# Altium PCB 795492740IHM08M1-DG_V4.PcbDoc
Units mil, origin at the board's own origin, x right, y up, seen from the top; angles counter-clockwise.
Board outline 2933.65 x 3933.51 mil, 2 copper layers (Top Layer, Bottom Layer); 137 components, 129 nets, 388 pads, 359 vias.
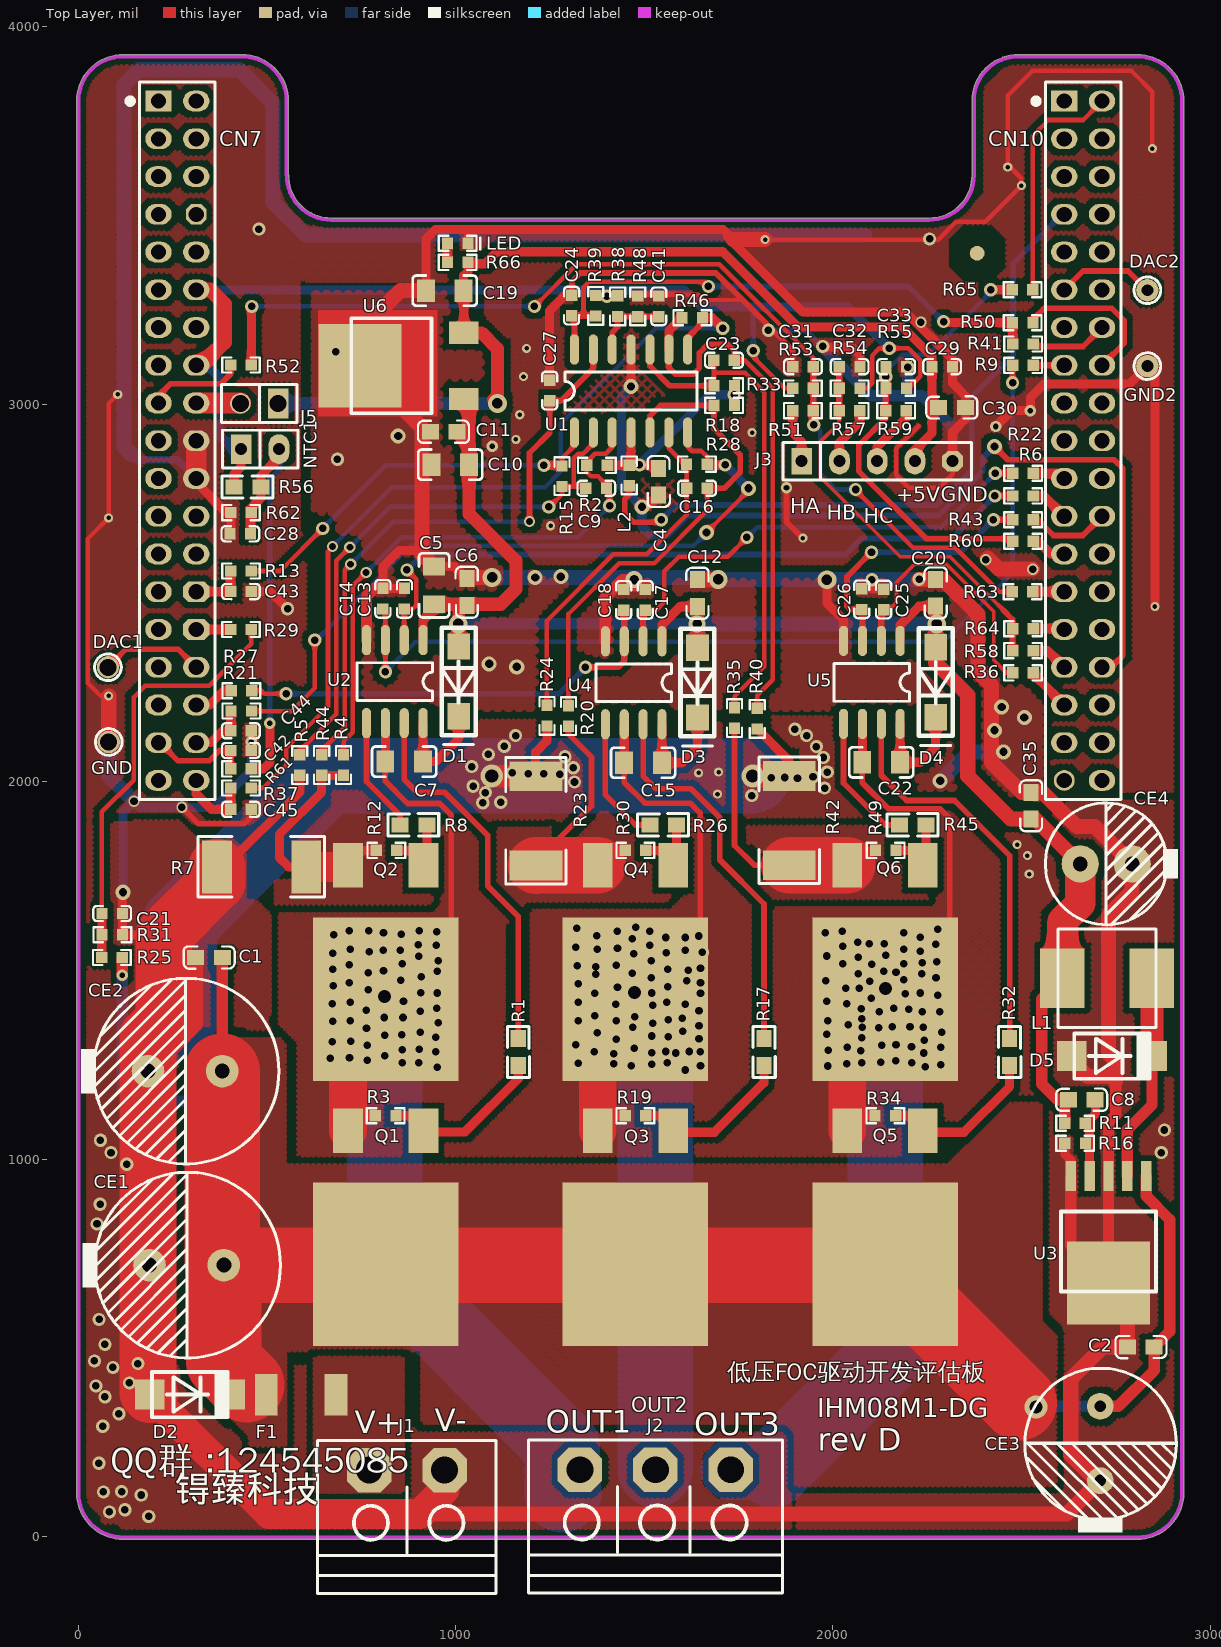
[diagram p0: Top Layer view]
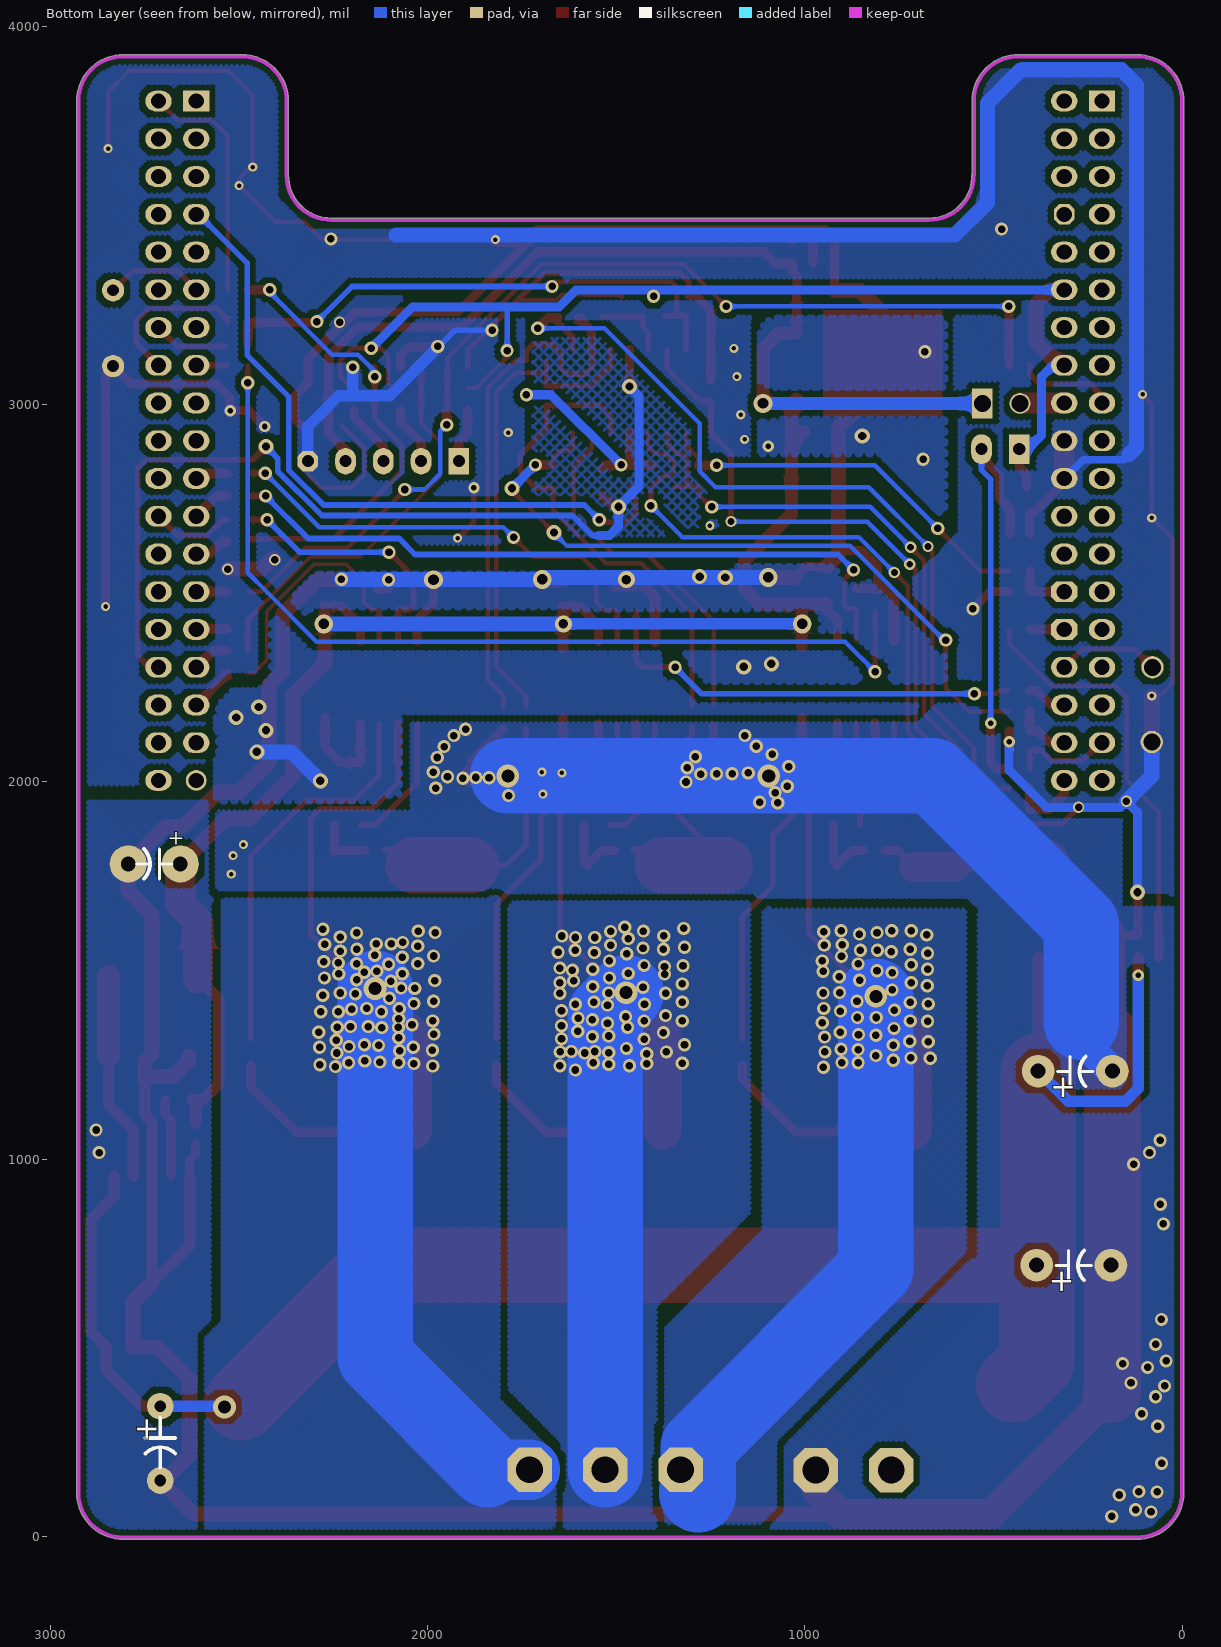
[diagram p1: Bottom Layer view, seen from below]

## Layer stack, top to bottom
Top Solder: solder mask 0.4, Solder Resist, Dk 3.5
Top Layer: signal copper 1.4
Dielectric 1: dielectric 12.6, FR-4, Dk 4.8
Bottom Layer: signal copper 1.4
Bottom Solder: solder mask 0.4, Solder Resist, Dk 3.5

## Board outline
-4.02,115.85 ccw(c119.11,115.85) 119.11,-7.27 2806.51,-7.27 ccw(c2806.51,115.85) 2929.64,115.85 2929.64,3803.11 ccw(c2806.51,3803.11) 2806.51,3926.24 2491.55,3926.24 ccw(c2491.55,3921.22) 2491.27,3926.23 ccw(c2491.55,3803.1) 2368.43,3803.1 2368.43,3606.24 cw(c2373.44,3606.24) 2368.43,3606.27 2368.43,3606.24 cw(c2255.33,3606.24) 2255.33,3493.14 670.65,3493.14 cw(c670.65,3606.24) 557.55,3606.24 ccw(c552.54,3606.24) 557.2,3608.09 557.2,3803.1 ccw(c434.07,3803.1) 434.08,3926.23 434.07,3926.23 cw(c434.07,3803.1) 434.08,3926.23 434.07,3926.23 119.11,3926.24 ccw(c119.11,3921.22) 119.11,3926.24 ccw(c119.11,3803.11) -4.02,3803.11

## Design rules (kind name [scope] priority, off if disabled: settings)
Clearance [All] p1: gap=15
PolygonConnect [All] p1: connectstyle=Direct reliefconductorwidth=20 reliefentries=4 polygonreliefangle="45 Angle" airgapwidth=20
RoutingVias [All] p1: holewidth=28 width=50 viastyle="Through Hole" minholewidth=12 minwidth=20 maxholewidth=50 maxwidth=100
SolderMaskExpansion [All] p1: expansion=4
Width [All] p1: maxlimit=200 minlimit=10 preferedwidth=10
30 further rules are at their usual default settings.

## Components (designator, comment, footprint, x,y, rotation, side; value= is the part's Value field where it differs from the comment)
C1 "104/63V" 0805C 349,1532 r180 top
C2 "104/63V" 0805C 2818,500 r180 top
C4 "47uF/16V" 0805C 1540,2797 r270 top
C5 "10uF/25V" 1206C 942.09,2519.29 r90 top
C6 "105/50V" 0805C 1028.09,2500.11 r90 top
C7 "106/25V" 1206C 863,2054 r0 top
C8 "102/25V" 0805C 2657.05,1158.99 r0 top
C9 "20pF/10V" 0603C 1374,2780 r180 top
C10 "10uF/25V" 1206C 986.59,2839 r180 top
C11 "104" 0805C 966,2929 r0 top
C12 "105/50V" 0805C 1639.09,2497.11 r90 top
C13 "100pF/10V" 0603C 867.09,2483.36 r90 top
C14 "100pF/10V" 0603C 810.09,2483.36 r90 top
C15 "106/25V" 1206C 1496,2051 r0 top
C16 "20pF/10V" 0603C 1641,2780 r180 top
C17 "100pF/10V" 0603C 1505.09,2480.36 r90 top
C18 "100pF/10V" 0603C 1448.09,2480.36 r90 top
C19 "47uF/16V" 1206C 972,3300 r180 top
C20 "105/50V" 0805C 2270.09,2498.11 r90 top
C21 "105/10V" 0603C 89,1648 r0 top
C22 "106/25V" 1206C 2127,2052 r0 top
C23 "20pF/10V" 0603C 1710,3114 r0 top
C24 "104/10V" 0603C 1310,3260 r90 top
C25 "100pF/10V" 0603C 2136.73,2481.36 r90 top
C26 "100pF/10V" 0603C 2079,2482 r90 top
C27 "104/10V" 0603C 1252,3035 r90 top
C28 "104/10V" 0603C 431,2659 r180 top
C29 "104/10V" 0603C 2288,3097 r0 top
C30 "47uF/16V" 0805C 2313,2993 r0 top
C31 "20pF/10V" 0603C 1921.64,3102.15 r180 top
C32 "20pF/10V" 0603C 2042.84,3097 r0 top
C33 "20pF/10V" 0603C 2166.32,3097 r0 top
C35 "104/50V" 0805C 2523,1934 r90 top
C41 "105/10V" 0603C 1541,3258 r90 top
C42 "105/10V" 0603C 430,2080 r0 top
C43 "102/10V" 0603C 430,2501 r0 top
C44 "102/10V" 0603C 430,2132 r0 top
C45 "102/10V" 0603C 430,1924 r0 top
CE1 "470uF/63V" E5-12.5 386,719 r180 top
CE2 "470uF/63V" E5-12.5 382,1233 r180 top
CE3 "220uF/63V" E5-10 2708,345 r270 top
CE4 "470uF/25V" E3.5-8.2 2655,1782 r0 top
CN7 "Header 19X2" 2*19P#1 212.81,3803.11 r270 top locked (schematic designator CN9)
CN10 "Header 19X2" 2*19P#2 2612.81,3803.11 r270 top locked
D1 "RS1M" TP4007 1008,2358 r270 top
D2 "SMAJ48A" TPss24 296,376 r0 top
D3 "RS1M" TP4007 1641,2355 r270 top
D4 "RS1M" TP4007 2272,2356 r270 top
D5 "SS24" TPss24 2739,1273 r0 top
DAC1 "DAC1" TP-1.5#1 79,2303 r0 top
DAC2 "DAC2" TP-1.5#2 2833,3302 r0 top
F1 "20A" F1808 584,371 r180 top
GND "GND" TP-1.5#1 81,2105 r90 top (schematic designator TP2)
GND2 "GND2" TP-1.5#2 2833,3101 r0 top
J1 "POWER" POW-5.08-2W 771,176 r0 top
J2 "MOTOR" POW-5.08-3W 1323,167 r0 top
J3 "SENSOR" SIP5 1917,2849 r0 top
J5 "5V IN" SIP2#1 530,3002 r180 top
L1 "47uH" L-TB-7*7 2726,1479 r180 top
L2 "10uH" 0603 1457,2809 r270 top
LED "RED" 0603D 977,3424 r0 top
NTC1 "10K" SIP2#2 432,2881 r0 top
Q1 "SE100150G" TO-263S 815,1075 r180 top
Q2 "SE100150G" TO-263S 815,1778 r180 top
Q3 "SE100150G" TO-263S 1476.5,1075 r180 top
Q4 "SE100150G" TO-263S 1476.5,1778 r180 top
Q5 "SE100150G" TO-263S 2138,1075 r180 top
Q6 "SE100150G" TO-263S 2138,1778 r180 top
R1 "51R" 0805 1167,1287 r270 top
R2 "6.8K/1%" 0603 1377,2835 r0 top
R3 "10K" 0603 817,1112 r0 top
R4 "680" 0603 706,2046 r90 top
R5 "1K/1%" 0603 590,2046 r90 top
R6 "22R" 0603 2501.02,2759.85 r180 top
R7 "0.01/3W/1%" 2512 368,1774 r0 top
R8 "51R" 0805 885,1886 r0 top
R9 "22R" 0603 2501.02,3105.85 r180 top
R11 "10K" 0603 2638.95,1097.77 r180 top
R12 "10K" 0603 819,1815 r0 top
R13 "22R" 0603 429,2561 r180 top
R15 "4.7K/1%" 0603 1279,2807 r270 top
R16 "1K" 0603 2643.91,1038.99 r0 top
R17 "51R" 0805 1818,1287 r270 top
R18 "6.8K/1%" 0603 1714,2994 r0 top
R19 "10K" 0603 1479,1112 r0 top
R20 "680" 0603 1302,2176 r90 top
R21 "22R" 0603 430,2190 r180 top
R22 "22R" 0603 2501.02,2819.85 r180 top
R23 "0.01/3W/1%" 2512 1213,2014 r270 top
R24 "1K/1%" 0603 1245,2177 r90 top
R25 "200K/1%" 0603 92,1531 r0 top
R26 "51R" 0805 1546.5,1886 r0 top
R27 "22R" 0603 435,2238 r0 top
R28 "4.7K/1%" 0603 1637,2844 r180 top
R29 "22R" 0603 429,2406 r180 top
R30 "10K" 0603 1479,1815 r0 top
R31 "10K/1%" 0603 88,1597 r180 top
R32 "51R" 0805 2469,1287 r270 top
R33 "6.8K/1%" 0603 1714,3046 r0 top
R34 "10K" 0603 2141,1112 r0 top
R35 "680" 0603 1742,2171 r90 top
R36 "22R" 0603 2501,2291 r180 top
R37 "22R" 0603 429,1986 r180 top
R38 "20K" 0603 1432.15,3262.02 r90 top
R39 "10K" 0603 1374.15,3263.02 r90 top
R40 "1K/1%" 0603 1802,2169 r90 top
R41 "22R" 0603 2505.98,3156.82 r0 top
R42 "0.01/3W/1%" 2512 1884,2015 r270 top
R43 "22R" 0603 2501.02,2696.85 r180 top
R44 "680" 0603 648,2046 r90 top
R45 "51R" 0805 2208,1886 r0 top
R46 "4.7K/1%" 0603 1625,3232 r180 top
R48 "5.1K" 0603 1480,3257 r270 top
R49 "10K" 0603 2142,1815 r0 top
R50 "22R" 0603 2505,3213 r0 top
R51 "2K" 0603 1922.98,2980.15 r0 top
R52 "22R" 0603 434,3101 r0 top
R53 "10K" 0603 1918.02,3045.42 r180 top
R54 "10K" 0603 2046.46,3039.72 r0 top
R55 "10K" 0603 2169.94,3039.72 r0 top
R56 "10K" 0805 452,2780 r180 top
R57 "2K" 0603 2041.5,2985.85 r180 top
R58 "22R" 0603 2501,2350 r180 top
R59 "2K" 0603 2164.98,2985.85 r180 top
R60 "22R" 0603 2501.02,2639.85 r180 top
R61 "22R" 0603 434,2031 r0 top
R62 "4.7K" 0603 434,2710 r0 top
R63 "22R" 0603 2500,2506 r180 top
R64 "22R" 0603 2501,2408 r180 top
R65 "22R" 0603 2500,3306 r180 top
R66 "1K" 0603 1008,3373 r0 top
U1 "RS624" SO-14 1315,2925 r90 top
U2 "PN7103SEC-R1" SO-8 914,2375 r270 top
U3 "XL7015E1" TO-252-5L 2730,955 r180 top
U4 "PN7103SEC-R1" SO-8 1547,2372 r270 top
U5 "PN7103SEC-R1" SO-8 2178,2373 r270 top
U6 "78M05" TO-252AA 1017,3014 r90 top

## Footprints (in the part's own frame and the unit in brackets; to place one, negate y for a bottom-side part, rotate by r counter-clockwise, add the part's x,y. Pads: shape width x height; smd on the part's side, far side on the other; paste and mask are expansions set on the pad)
2*19P#1 [mil]
  rect 55x70 hole 40: 1(0,0)
  oval 55x70 hole 40: 2(0,100) 3(100,0) 4(100,100) 5(200,0) 6(200,100) 7(300,0) 9(400,0) 10(400,100) 11(500,0) 12(500,100) 13(600,0) 14(600,100) 15(700,0) 16(700,100) 17(800,0) 18(800,100) 19(900,0) 20(900,100) 21(1000,0) 22(1000,100) 23(1100,0) 24(1100,100) 25(1200,0) 26(1200,100) 27(1300,0) 29(1400,0) 31(1500,0) 32(1500,100) 33(1600,0) 34(1600,100) 35(1700,0) 36(1700,100) 37(1800,0) 38(1800,100)
  oct 55x55 hole 40: 8(300,100)
  oct 55x70 hole 40: 28(1300,100) 30(1400,100)
  silkscreen extent -50,-82 1850,150
2*19P#2 [mil]
  rect 55x70 hole 40: 1(0,0)
  oval 55x70 hole 40: 2(0,100) 3(100,0) 4(100,100) 5(200,0) 6(200,100) 7(300,0) 8(300,100) 9(400,0) 10(400,100) 11(500,0) 12(500,100) 13(600,0) 14(600,100) 15(700,0) 16(700,100) 17(800,0) 18(800,100) 19(900,0) 20(900,100) 21(1000,0) 22(1000,100) 23(1100,0) 24(1100,100) 25(1200,0) 26(1200,100) 27(1300,0) 28(1300,100) 29(1400,0) 30(1400,100) 31(1500,0) 32(1500,100) 33(1600,0) 34(1600,100) 35(1700,0) 36(1700,100) 38(1800,100)
  round 55 hole 40: 37(1800,0)
  silkscreen extent -50,-82 1850,150
0603 [mil]
  rect 30x30 smd: 1(-29.48,2.91) 2(25.02,2.85)
  silkscreen extent -52,-17 48,23
0603C [mil]
  rect 30x30 smd: 1(-25.86,2.64) 2(28.64,2.57)
  silkscreen extent -49,-17 51,23
0603D [mil]
  rect 30x30 smd: A(1.66,2.32) K(56.16,2.26)
  silkscreen extent -21,-18 89,22
0805 [mil]
  rect 45x40 smd: 1(-31.97,-0.94) 2(38.9,-0.94)
  silkscreen extent -65,-30 70,29
0805C [mil]
  rect 45x40 smd: 1(-33.05,-1.99) 2(37.82,-1.99)
  silkscreen extent -66,-31 69,28
1206C [mm]
  rect 1.2x1.5 smd: 1(1.288,-0.023) 2(-1.252,-0.023)
  silkscreen extent -2.14,-1.04 2.18,0.99
2512 [mm]
  rect 2x3.556 smd: 1(0,0) 2(6,0)
  silkscreen extent -1.27,-2.03 7.24,2.03
E3.5-8.2 [mm]
  round 2.5 hole 1: 1(0,0) 2(3.5,0)
  silkscreen extent -2.35,-4.1 6.59,4.1
E5-10 [mm]
  round 1.8 hole 0.8: 1(0,0) 2(5,0)
  silkscreen extent -2.56,-5.07 8.5,5.13
E5-12.5 [mm]
  round 2.2 hole 1: 1(0,0) 2(5,0)
  silkscreen extent -3.81,-6.25 9.5,6.25
F1808 [mil]
  rect 60x110.24 smd: 1(-99.06,-4) 2(85.94,-4)
L-TB-7*7 [mm]
  rect 3x4 smd: 1(-3,0) 2(3,0)
  silkscreen extent -3.3,-3.3 3.3,3.3
POW-5.08-2W [mm]
  oct 3x3 hole 1.8: 1(0,0) 2(5.08,0)
  silkscreen extent -3.46,-8.3 8.54,2
POW-5.08-3W [mm]
  oct 3x3 hole 1.8: 1(0.163,0.254) 2(5.243,0.254) 3(10.323,0.254)
  silkscreen extent -3.3,-8.05 13.78,2.25
SIP2#1 [mil]
  rect 55x78.74 hole 45: 1(0,0)
  round 55 hole 45: 2(100,0)
  silkscreen extent -50,-50 150,50
SIP2#2 [mil]
  rect 55x78.74 hole 32: 1(0,0)
  oval 55x78.74 hole 32: 2(100,0)
  silkscreen extent -50,-50 150,50
SIP5 [mil]
  rect 55x70 hole 32: 1(0,0)
  oval 55x70 hole 32: 2(100,0) 3(200,0) 4(300,0)
  oct 55x55 hole 32: 5(400,0)
  silkscreen extent -50,-50 450,50
SO-8 [mil]
  oval 80x24 smd: 1(0,0) 2(0,-50) 3(0,-100) 4(0,-150) 5(220,-150) 6(220,-100) 7(220,-50) 8(220,0)
  silkscreen extent 60,-175 160,25
SO-14 [mil]
  oval 80x24 smd: 1(0,0) 2(0,-50) 3(0,-100) 4(0,-150) 5(0,-200) 6(0,-250) 7(0,-300) 8(220,-300) 9(220,-250) 10(220,-200) 11(220,-150) 12(220,-100) 13(220,-50) 14(220,0)
  silkscreen extent 60,-325 160,25
TO-252-5L [mm]
  rect 0.7x2 smd: 1(-2.54,0) 2(-1.27,0) 3(0,0) 4(1.27,0) 5(2.54,0)
  rect 5.6x5.6 smd: 3(0,7.2)
  silkscreen extent -3.2,2.38 3.2,7.78
TO-252AA [mm]
  rect 1.5x2 smd: 1(0,-0.127) 3(4.445,-0.127)
  rect 5.6x5.6 smd: 2(2.235,6.87)
  silkscreen extent -0.96,2.05 5.44,7.45
TO-263S [mm]
  rect 2x3 smd: 1(-2.54,0) 3(2.54,0)
  rect 9.8x11 smd: 2(0,9)
TP4007 [mil]
  rect 70x60 smd: A(0,0) K(185,0)
  silkscreen extent -50,-45 260,46
TP-1.5#1 [mm]
  round 1.5 hole 1.143: 1(0,0)
  silkscreen extent -0.9,-0.9 0.9,0.9
TP-1.5#2 [mm]
  round 1.5 hole 0.8: 1(0,0)
  silkscreen extent -0.9,-0.9 0.9,0.9
TPss24 [mm]
  rect 2x2 smd: A(-2.7,0) K(2.7,0)
  silkscreen extent -2.54,-1.52 2.54,1.52

## Part data
C1 C2 C4 C6 C7 C9 C12 C13 C14 C15 C16 C17 C18 C20 C21 C22 C23 C24 C25 C26 C27 C28 C29 C30 C31 C32 C33 C35 C41 C42 C43 C44 C45: library part C, "C"
C5 C8 C10 C11 C19: library part C, "Capacitor"
CE1 CE2 CE3 CE4: library part CE, "10uF/25V"
CN7 CN10: "Header, 19-Pin, Dual row"
D1 D2 D3 D4 D5: library part D, "D"
DAC1 DAC2 GND GND2: library part TP
F1: library part FUSE, "FUSE"
J1 J5 NTC1: library part CON2, "J"
J2: library part CON3, "CN"
J3: library part CON5, "CN"
L1: library part L, "10uH"
L2: library part L
LED: library part LED, "LED"
Q1 Q2 Q3 Q4 Q5 Q6: library part "MOSFET N"
R1 R2 R4 R5 R6 R7 R8 R9 R13 R15 R16 R17 R18 R20 R21 R22 R23 R24 R25 R26 R27 R28 R29 R31 R32 R33 R35 R36 R37 R38 R40 R41 R42 R43 R44 R45 R46 R48 R50 R51 R52 R57 R58 R59 R60 R61 R62 R63 R64 R65 R66: library part R, "10K"
R3 R11 R12 R19 R30 R34 R39 R49 R53 R54 R55 R56: library part R
U1: library part LM324
U2 U4 U5: library part IR2101S
U3: library part XL1507-ADJ
U6: library part 7805S, "IC"

## Free pads (board coordinates)
  round 39.37 smd mask+39.37: 5(2382,3400)

## Via types
v1: diameter 35, hole 20, Top Layer to Bottom Layer, 291 vias
v2: diameter 24, hole 12, Top Layer to Bottom Layer, 21 vias
v3: diameter 40, hole 22, Top Layer to Bottom Layer, 16 vias
v4: diameter 30, hole 15, Top Layer to Bottom Layer, 7 vias
v5: diameter 60, hole 35, Top Layer to Bottom Layer, 6 vias
v6: diameter 50, hole 28, Top Layer to Bottom Layer, 6 vias
v7: diameter 30, hole 20, Top Layer to Bottom Layer, 5 vias
v8: diameter 30, hole 18, Top Layer to Bottom Layer, 5 vias
v9: diameter 45, hole 25, Top Layer to Bottom Layer, 2 vias

## Nets (pads, with @x,y where several pads share a name; then routed paths per layer and width w, separated by ;. In a path a pad name is that pad's centre, name@x,y a point inside that pad or via, vN(x,y) a via of type N, cw(c..) or ccw(c..) an arc to the next point about the centre after c; other vN are vias at no path point)
3V3: CN7.12 CN7.16 NTC1.1 R38.2 R39.2 R53.2 R54.2 R55.2 R56.2 | length 3240.8
  Top Layer w12: v1(1789,3142) 1789,3125.11 1871.54,3042.57 R53.2 ; R54.2 2091.57,3042.57 2104,3055 2104,3129 2123,3148 v1(2149,3148) 2199.16,3148 2231.14,3116.02 2231.14,3074.17 2199.55,3042.57 R55.2
  Top Layer w24: R56.2 413.1,2815.1 432,2834 NTC1.1
  Top Layer w40: CN7.16 326.11,3103.11 387,3164 387,3266 349.89,3303.11 CN7.12
  Bottom Layer w15: v1(1789,3142) 1789,3255 1791,3257
  Bottom Layer w24: CN7.16 342.89,3103.11 373,3073 373,2918 410,2881 NTC1.1 ; CN7.12 v1@1402,3303.11 ; v1(1401,3286) 1401,3302.11 v1@1402,3303.11 ; v1(2149,3148) 2040,3257 1791,3257 1652,3257 1605.89,3303.11 v1@1402,3303.11
+5: C19.2 C29.1 C30.1 J3.4 J5.1 R66.2 U6.3 | length 2693.4
  Top Layer w24: C19.2 1021.29,3340.29 1033.02,3352.02 R66.2 1036.87,3372 1077,3372 1109,3404 1708,3404 1908,3204 2184.73,3204 2262.14,3126.59 C29.1 2262.14,2923.14 2217,2878 J3.4 ; U6.3 C19.2@1022,3300.91
  Top Layer w35: U6.3 1069,3189 1111,3147 v6(1111,3002) v6@1101,3012
  Bottom Layer w35: J5.1 v6(1111,3002)
+14: C5.2 C6.1 C8.1 C10.2 C11.2 C12.1 C20.1 C35.1 CE4.1 D1.A D3.A D4.A L1.2 R11.2 U2.1 U4.1 U5.1 U6.1 | length 4411.9
  Top Layer w24: U2.1 914,2427 943,2456 C5.2 ; U4.1 1547,2416 1595.07,2464.07 C12.1 ; U5.1 2178,2415 2228.07,2465.07 C20.1
  Top Layer w30: 1005,2470 1008,2467 D1.A ; D3.A 1641.09,2355.09 C12.1 ; D4.A@2272.09,2356.09 C20.1 ; L1.2 2553,1424.11 2553,1199 2595,1157 C8.1 2613.93,1146.93 R11.2
  Top Layer w35: C5.2 1005,2470 1120,2470 1160,2510 1160,2585 1035.89,2709.11 C10.2 1035.89,2894.94 ; C11.2 1035.89,2894.94 ; U6.1 1035.89,3000.11 1035.89,2894.94
  Top Layer w40: D4.A@2272.09,2356.09 2272.09,2314.91 2357,2230 2357,2015 2471.05,1900.95 C35.1 2536.05,1900.95 CE4.1
  Top Layer w80: L1.2 2607.89,1629.89 2655,1677 CE4.1
  Bottom Layer w30: v6(1007,2418) v9(1640,2418)
  Bottom Layer w40: v9(1640,2418) v6(2275,2418)
AGND: C4.2 CN10.32 U1.11 | length 2555.6
  Top Layer w15: v3(2428,2888) 2463,2853 2745,2853 2768,2830 2768,2334 2737.11,2303.11 CN10.32
  Top Layer w24: v3@1460,3042 v3(1465,3047) U1.11 ; v3(1494,2728) 1506.83,2728 C4.2
  Bottom Layer w15: 1546,2652 1563,2652 1616,2705 2279.53,2705 2397,2822.47 2397,2857 v3(2428,2888)
  Bottom Layer w24: v3(1465,3047) 1440,3022 1440,2782 v3(1494,2728) 1494,2676 1518,2652 1546,2652
AVDD: CN10.7 L2.2 | length 1846.7
  Top Layer w15: L2.2 1459.85,2759.85 1448,2748 1448,2712 1473,2687 1538,2687 v1(1545,2694)
  Bottom Layer w15: v1(1545,2694) 1584,2733 2275,2733 2368,2826 2368,3020 2478,3130 2478,3374 2607.11,3503.11 CN10.7
BKIN: C24.1 R39.1 R41.1 R50.1 U1.14 | length 1459.9
  Top Layer w12: 1339,3234.16 1339,3310 1353,3324 1658,3324 v1(1670,3312)
  Top Layer w15: U1.14 C24.1@1315,3227.67 ; C24.1@1315,3233.67 1314.51,3234.16 1339,3234.16 1370.62,3234.16 R39.1
  Top Layer w24: v1(2293,3219) 2296.09,3215.91 R50.1 2476.5,3214.93 R41.1
  Bottom Layer w15: v1(1670,3312) 2200,3312 v1(2293,3219)
C7_1: CN7.1
C7_2: CN7.2
C7_3: CN7.3
C7_4: CN7.4
C7_5: CN7.5
C7_6: CN7.6
C7_7: CN7.7
C7_8: CN7.8
C7_9: CN7.9
C7_10: CN7.10
C7_11: CN7.11
C7_13: CN7.13
C7_14: CN7.14
C7_15: CN7.15
C7_17: CN7.17 R52.1 | length 258.7
  Top Layer w15: CN7.17 212.81,3022.81 244,3054 378,3054 404.52,3080.52 R52.1
C7_18: CN7.18 J5.2 | length 117.1
  Top Layer w55: CN7.18 J5.2@429.89,3003.11
C7_19: CN7.19
C7_21: CN7.21
C7_23: CN7.23
C7_24: CN7.24
C7_25: CN7.25
C7_26: CN7.26
C7_27: CN7.27
C7_28: C43.1 CN7.28 R13.2 | length 146.1
  Top Layer w24: CN7.28 313.34,2503.64 C43.1 403.98,2503.8 R13.2
C7_29: CN7.29
C7_30: CN7.30 R29.2 | length 91.1
  Top Layer w24: CN7.30 R29.2
C7_31: CN7.31
C7_32: CN7.32 DAC1.1 | length 273.5
  Top Layer w15: DAC1.1 127,2351 264.92,2351 CN7.32
C7_33: CN7.33
C7_34: CN7.34 R27.1 | length 108.4
  Top Layer w24: CN7.34 348.11,2203.11 385.91,2240.91 R27.1
C7_35: C42.1 CN7.35 R61.1 | length 271.6
  Top Layer w15: CN7.35 216.89,2103.11 265,2055 347,2055 374.64,2082.64 C42.1 404.14,2034.29 R61.1
C7_36: C44.1 CN7.36 R21.2 | length 157.3
  Top Layer w24: CN7.36 351.11,2103.11 382.64,2134.64 C44.1 404.98,2135.48 R21.2
C7_37: CN7.37
C7_38: C45.1 CN7.38 R37.2 | length 200.6
  Top Layer w24: CN7.38 312.81,1967.19 353.36,1926.64 C45.1 404.14,1982.99 R37.2
C10_1: CN10.1
C10_2: CN10.2 R65.1 | length 629.7
  Top Layer w12: R65.1 2529.48,3711.48 2571,3753 2662.7,3753 CN10.2
C10_3: CN10.3
C10_4: CN10.4
C10_5: CN10.5
C10_6: CN10.6
C10_8: CN10.8
C10_9: CN10.9
C10_10: CN10.10
C10_11: CN10.11 DAC2.1 | length 262
  Top Layer w15: CN10.11 2662.7,3353 2782,3353 DAC2.1
C10_12: CN10.12
C10_13: CN10.13 | length 18.7
  Top Layer w24: CN10.13@2599.59,3216.33 CN10.13
C10_14: CN10.14 R41.2 | length 195.9
  Top Layer w15: R41.2@2537.67,3153 2662.7,3153 CN10.14
C10_15: CN10.15 R9.1 | length 82.1
  Top Layer w15: R9.1 CN10.15@2612.64,3102.94
C10_16: CN10.16 R50.2 | length 418.4
  Top Layer w10: CN10.16 CN10.16@2717.7,3108
  Top Layer w15: R50.2 2530.02,3225.02 2559,3254 2739,3254 2771,3222 2771,3161.3 CN10.16@2717.7,3108
C10_17: CN10.17
C10_18: CN10.18
C10_19: CN10.19
C10_20: CN10.20
C10_21: CN10.21 R22.1 | length 88
  Top Layer w24: R22.1 2598.99,2816.94 CN10.21
C10_22: CN10.22
C10_23: CN10.23 R6.1 | length 104.6
  Top Layer w24: R6.1 2558.99,2756.94 CN10.23
C10_24: CN10.24 R43.1 | length 220.9
  Top Layer w15: R43.1 2542.06,2693.94 2584,2652 2661.7,2652 CN10.24
C10_25: CN10.25 R60.1 | length 96.3
  Top Layer w24: R60.1 2543.06,2636.94 2576.89,2603.11 CN10.25
C10_26: CN10.26
C10_27: CN10.27 R63.1 | length 83.3
  Top Layer w24: R63.1 CN10.27
C10_28: CN10.28
C10_29: CN10.29 R64.1 | length 83.3
  Top Layer w24: R64.1 2610.49,2405.09 2612.64,2402.94 CN10.29
C10_30: CN10.30
C10_31: CN10.31 R58.1 | length 100.5
  Top Layer w24: R58.1 2568.83,2347.09 CN10.31
C10_33: CN10.33 R36.1 | length 119.1
  Top Layer w24: R36.1 2530.48,2285.44 CN10.33
C10_34: CN10.34
C10_35: CN10.35
C10_36: CN10.36
C10_37: CN10.37
C10_38: CN10.38
GND: C1.2 C2.2 C5.1 C6.2 C10.1 C11.1 C12.2 C13.2 C14.2 C17.2 C18.2 C19.1 C20.2 C21.2 C24.2 C25.2 C26.2 C27.2 C28.2 C29.2 C30.2 C31.2 C32.2 C33.2 C35.2 C41.2 C42.2 C43.2 C44.2 C45.2 CE1.2 CE2.2 CE3.2 CE4.2 CN7.20 CN7.22 D2.A D5.A GND2.1 GND.1 J1.2 J3.5 LED.K R5.1 R7.1 R16.1 R23.1 R24.1 R31.1 R40.1 R42.1 R48.1 R62.1 U2.4 U3.3 U3.5 U4.4 U5.4 U6.2 | length 28387.2
  Top Layer w10: 1582,3291 1643.7,3291 1658.7,3276 1754,3276 1757.38,3279.38
  Top Layer w12: v2(81,2227) 60,2227 26,2261 26,2644 v2(81,2699) 81,3002 v2(105,3026) ; v2(1820,3436) 2278.98,3436 2325.98,3483 2403,3483 v2(2499,3579) 2499,3599 2463,3635 2463,3818 2528,3883 2791,3883 2846,3828 v2(2846,3677) v2@2853,3670 ; 2227,2943 2168,2884 2168,2812 2201,2779 2282,2779 2317,2814 J3.5
  Top Layer w15: v7(275,1932) 319,1888 439,1888 458.64,1907.64 C45.2 ; C24.2 1307.43,3324.19 1330.73,3347.5 1689.27,3347.5 1757.38,3279.38 1893,3143.77 C31.2 ; R48.1@1486.06,3286.5 1490.56,3291 1582,3291 ; v4(1877,2779) 1877,2688 v2(1920,2645)
  Top Layer w24: v3(119,1707) 117.48,1705.48 R31.1 225.91,1594.09 227,1593 ; CN7.22 312.81,2793.19 393.09,2712.91 R62.1 404.52,2658.59 C28.2 ; R7.1 389,1774 587.09,1972.09 R5.1 ; C42.2 C44.2 ; C43.2 509.43,2503.57 v1(555,2458) ; C13.2 C14.2 807.52,2569.52 850,2612 911,2612 ; C19.1 921.29,3437.29 947.13,3463.13 1034,3463.13 ; C5.1 998.02,2570 C6.2@1027.02,2541 ; LED.K@1033.16,3433.26 1034,3434.1 1034,3463.13 ; R23.1 1212,2015 1212,2078 1242.09,2108.09 R24.1 ; C27.2 1249.43,3247.43 1290.64,3288.64 C24.2 ; 1720,3444 1920,3244 2192.82,3244 2316.64,3120.17 C29.2 2316.64,3056.36 2350.82,3022.18 C30.2 2350.82,2959.82 2317,2926 J3.5 ; 1735.4,3436 1708.27,3463.13 1034,3463.13 ; R40.1 1884,2054.61 R42.1 ; v6(1984,2535) 1984,2473 2028,2429 U5.4 ; v1@1986,3152 2049,3152 2071.48,3129.52 C32.2 ; v1(2103,2535) 2103,2511.64 2104,2510.64 2133.52,2510.64 C25.2 ; v4(2431,2941) 2473,2983 v4(2523,2983) 2523,3017 2559,3053 2785,3053 GND2.1 2853,3081 v2(2853,2464) ; R16.1 2614.43,1012.57 2630,997 U3.5
  Top Layer w30: U2.4 764,2491 785,2512 C14.2 ; U4.4 1397,2489 1443,2535 v9(1473,2535) ; U3.5 2630,771.54 2730,671.54 2730,955 2730,1098 2749,1117 2749,1205
  Top Layer w40: GND.1 v2(81,2227) ; CE2.2 311.18,1359.03 C1.2 ; 906,59.74 2619.59,59.74 CE3.2 2697.85,148.15 2630,216 2630,417 2715,502 C2.2 2780.18,621.35 U3.3@2730,671.54 ; C19.1 853.91,3300.91 746.54,3193.54 U6.2 911,2937.54 911,2612 911,2602 C5.1 ; C6.2@1027.02,2541 v6(1097,2541) ; C12.2 1694.93,2534.93 v6(1696,2536) ; 1735.4,3436 v2(1820,3436) ; v1@2228.07,2535.93 C20.2 2291.57,2535.93 2384,2443.5 2384,2292 2420,2256 2420,2051 2499.18,1971.82 C35.2 2555.29,1971.82 2646.1,1881 2693.8,1881 CE4.2 2792.8,1709.8 2730,1647 2730,1279 2749,1260 2749,1228 ; v7@2409.49,2592.49 2438.98,2563 v7(2529,2563) ; D5.A 2632.7,1260.3 2674,1219 2740,1219 2749,1228 ; 2749,1205 2749,1228
  Top Layer w55: CN7.22 CN7.20
  Top Layer w60: v5(1096,2015) 1097,2014 R23.1 ; v5(1787,2015) R42.1
  Top Layer w80: D2.A 505.96,59.74 906,59.74 971,124.74 J1.2
  Top Layer w150: D2.A 185.15,380.55 CE2.2 185.15,1325.15 227,1367 227,1593 368,1734 R7.1
  Bottom Layer w15: v1(1829,3196) 1927,3196 v1@1973,3150
  Bottom Layer w20: 141,2867 155,2853 262.92,2853 CN7.22
  Bottom Layer w24: v3(119,1707) 119,1919 v7(148,1948) 164,1932 v7(275,1932) 361,1932 459,2030 v4(459,2106)
  Bottom Layer w30: v1@1973,3150 2101,3022 2198,3022 ; v1(2198,3098) 2198,3022 ; J3.5 2317,2941 2236,3022 2198,3022
  Bottom Layer w40: GND.1 81,2015 v7(148,1948) ; 141,2867 121,2887 121,3846 161.21,3886.21 422.45,3886.21 423.13,3885.53 428.47,3885.53 516.5,3797.5 516.5,3534.5 603,3448 2083.13,3448 ; CE1.2@185.15,723 CE1.2 ; v6(1097,2541) v6@1686,2541 ; v6(1696,2536) v1(2228,2536) ; v3(2284,2002) 2361,2079 v3(2452,2079)
  Bottom Layer w80: CE2.2 268,1315.85 268,1363
  Bottom Layer w200: 268,1363 268,1622 661,2015 v5(1096,2015) v5(1787,2015)
  other v1: 187,53 83,65 124,71 167,109.84 67,118 115,119 55,194 65,292 108,325.24 71,370 47,399 136,407 92,448 158.25,458 43,465 71,509 55.39,575 50,828 58,880 129,986 87,1017 2870,1017 59,1050 2878,1077 1072,1944 1120,1945.35 1785,1963 1079,1971 1977.89,1983 1046.55,1988 1315.07,1999 1906,2009 1837,2010 1872.08,2011 1947,2013 1276,2020 1193,2021 1234,2021 1150,2023 1985,2025.36 1312,2037 1043,2040 1974,2063.96 1290,2066 1087,2072 1956,2093 1129,2094 1159,2122 1930,2122 1899,2139 687,2854 682,3139 1973,3153 2256,3438 479,3464
  other v2: 2520,1755 2515,1804 2488,1833 1694,1967 1644,2023 1697,2025 1252,2678 1160,2907 1786,2925 1170,2972 1180,3073 1188,3148 2463,3628
  other v3: 2428,2136 2507,2170 2447,2197.55 1162,2304 1089,2312 1211,2541 1279,2543 848,2916
  other v4: 1097,2889
  other v7: 2405,2588 2233,3217
NetC7_1: C7.1 D1.K U2.8 | length 279.7
  Top Layer w24: U2.8 914,2053.39 947.39,2053.39 1008,2114 D1.K
NetC8_2: C8.2 R11.1 R16.2 U3.4 | length 209.1
  Top Layer w24: U3.4 2680,1104 2696,1120 2696,1155.87 C8.2
NetC9_1: C9.1 R2.1 R4.2 U1.3 | length 1501.3
  Top Layer w12: R4.2 703.15,2106.15 728,2131 728,2519 v8(763,2554) ; v1(1408,2731) 1408,2779.24 1378.62,2808.62 1359.38,2808.62 1347.52,2820.48 R2.1 1347.52,2847.52 1368.85,2868.85 1397.85,2868.85 1415,2886 U1.3
  Bottom Layer w12: v8(763,2554) 857,2648 1325,2648 v1(1408,2731)
NetC9_2: C9.2 R5.2 R15.2 U1.2 | length 1485.4
  Top Layer w12: R5.2 587.15,2082.15 684,2179 684,2585 v8(720,2621) ; v1(1247,2728) 1249,2728 1281.85,2760.85 R15.2 1312,2781.98 ; C9.2@1347.36,2778.43 1343.8,2781.98 1312,2781.98 ; U1.2 1365,2896.11 1337.89,2869 1325,2869 1312.91,2856.91 1312.91,2782.89 1312,2781.98
  Bottom Layer w12: v8(720,2621) 827,2728 v1(1247,2728)
NetC15_1: C15.1 D3.K U4.8 | length 292.3
  Top Layer w24: U4.8 1547,2050.39 C15.1 1600.09,2050.09 1641,2091 D3.K
NetC16_1: C16.1 R18.1 R20.2 U1.5 | length 1319.3
  Top Layer w12: R20.2 1299.15,2444.15 1434,2579 1527,2579 1666.86,2718.86 C16.1
  Top Layer w15: U1.5 1515,2969 1542.91,2996.91 R18.1 1684.52,2935.48 1754,2866 1754,2819 1712.36,2777.36 C16.1
NetC16_2: C16.2 R24.2 R28.2 U1.6 | length 1011.6
  Top Layer w12: R24.2 1242.15,2426.15 1418,2602 1507,2602 1611.98,2706.98 R28.2@1611.98,2836.02 ; U1.6 1565,2883 R28.2@1611.98,2836.02 ; R28.2 R28.2@1611.98,2836.02 ; C16.2 1612.36,2835.64 R28.2@1611.98,2836.02
NetC22_1: C22.1 D4.K U5.8 | length 292.3
  Top Layer w24: U5.8 2178,2051.39 C22.1 2231.09,2051.09 2272,2092 D4.K
NetC23_1: C23.1 R33.1 R35.2 U1.10 | length 1325.7
  Top Layer w12: C23.1 1684.14,3049.29 R33.1 ; 1685,3083 1767,3083 1818,3032 1818,2305 1739.15,2226.15 R35.2
  Top Layer w15: U1.10 1515,3101 1567.09,3048.91 R33.1
NetC23_2: C23.2 R40.2 R46.2 U1.9 | length 1413
  Top Layer w12: C23.2 1766.43,3116.57 1840,3043 1840,2270 1799.15,2229.15 R40.2
  Top Layer w15: U1.9 1565,3097 1582,3080 1630,3080 1646,3096 1646,3136 1668,3158 1721,3158 1740,3139 1738.64,3137.64 C23.2
  Top Layer w24: U1.9 1565,3194.17 R46.2
NetC27_1: C27.1 R44.2 U1.13 | length 1601.1
  Top Layer w12: R44.2 645.15,2083.15 706,2144 706,2560 v8(722,2576)
  Top Layer w15: v8(1196,2689) 1196,2871 1249.36,2924.36 C27.1 1279.14,3009.14 1365,3095 U1.13
  Bottom Layer w12: v8(722,2576) 835,2689 v8(1196,2689)
NetD5_K: D5.K L1.1 U3.2 | length 556.1
  Top Layer w30: U3.2 2780,1078 2845.3,1143.3 D5.K
  Top Layer w60: L1.1@2845.11,1484 2845.3,1483.81 D5.K
NetF1_1: F1.1 J1.1
NetJ3_1: J3.1 R51.1 | length 143.8
  Top Layer w24: R51.1 1893.5,2924.5 1917,2901 J3.1
NetJ3_2: J3.2 R57.1 | length 156.3
  Top Layer w24: J3.2 2017,2898 2070.98,2951.98 R57.1
NetJ3_3: J3.3 R59.1 | length 166
  Top Layer w24: J3.3 2117,2887 2194.46,2964.46 R59.1
NetLED_A: LED.A R66.1 | length 50.5
  Top Layer w24: R66.1 978.66,3376.06 LED.A
NetQ1_1: Q1.1 R1.2 R3.2 | length 435.3
  Top Layer w24: R3.2 875.15,1114.85 Q1.1 918,1072 1025,1072 1166.06,1213.06 R1.2
NetQ2_1: Q2.1 R8.2 R12.2 | length 198.2
  Top Layer w24: R12.2 875.15,1817.85 Q2.1 923.9,1786.9 R8.2
NetQ3_1: Q3.1 R17.2 R19.2 | length 431.5
  Top Layer w24: R19.2 1536.65,1114.85 Q3.1 1580.5,1071 1686,1071 1817.06,1202.06 R17.2
NetQ4_1: Q4.1 R26.2 R30.2 | length 199.7
  Top Layer w24: R30.2 1536.65,1817.85 Q4.1 1585.4,1786.9 R26.2
NetQ5_1: Q5.1 R32.2 R34.2 | length 426.4
  Top Layer w24: R34.2 2198.15,1114.85 Q5.1 2242,1071 2347,1071 2468.06,1192.06 R32.2
NetQ6_1: Q6.1 R45.2 R49.2 | length 149.7
  Top Layer w24: R49.2 2245.05,1817.85 2246.9,1816 R45.2
NetR1_1: R1.1 U2.7 | length 1003.9
  Top Layer w15: U2.7 864,2006 898,1972 971,1972 1085,1858 1085,1724 1166.06,1642.94 R1.1
NetR8_1: R8.1 U2.5 | length 306.8
  Top Layer w15: U2.5 764,2000 853.03,1910.97 R8.1
NetR13_1: R13.1 R15.1 U1.1 | length 1042.2
  Top Layer w12: R13.1 535.09,2558.09 v1(648,2671) ; R15.1 1281.91,2857.03 1315,2890.11 U1.1
  Top Layer w24: v1(1234,2838) 1280.39,2838 R15.1
  Bottom Layer w12: v1(648,2671) 815,2838 v1(1234,2838)
NetR17_1: R17.1 U4.7 | length 1020.1
  Top Layer w15: U4.7 1497,2015 1531,1981 1624,1981 1700,1905 1700,1793 1817.06,1675.94 R17.1
NetR21_1: R21.1 R28.1 U1.7 | length 1911.8
  Top Layer w12: R21.1 566.09,2187.09 627,2248 v1(627,2375) ; U1.7 1615,2887 1626,2876 1651,2876 1666.48,2860.52 R28.1 R28.1@1668.57,2839 ; v3(1665,2660) 1776,2771 v3(1776,2777) ; v1(1714,2839) 1714,2841.17 v1@1717.83,2845
  Top Layer w24: R28.1@1668.57,2839 v1(1714,2839)
  Bottom Layer w12: v1(627,2375) 631,2375 881.5,2625.5 1631.5,2625.5 v3@1672,2666
  Bottom Layer w24: v1(1714,2839) v3(1776,2777)
NetR26_1: R26.1 U4.5 | length 337.6
  Top Layer w15: U4.5 1397,1965 1476.94,1885.06 R26.1
NetR32_1: R32.1 U5.7 | length 1049.3
  Top Layer w15: U5.7 2128,2017 2195,1950 2322,1950 2468.06,1803.94 R32.1
NetR37_1: R37.1 R46.1 U1.8 | length 2261.1
  Top Layer w12: R37.1 490.09,1983.09 552,2045 552,2089 662,2199 662,2611 v8(674,2623)
  Top Layer w15: U1.8 1615,3176 1654.48,3215.48 R46.1
  Top Layer w24: R46.1 1679.91,3229.09 v1(1708,3201)
  Bottom Layer w12: v8(674,2623) 831,2780 1237,2780 1279,2822 1279,2949 1531,3201 v1(1708,3201)
NetR45_1: R45.1 U5.5 | length 351
  Top Layer w15: U5.5 2028,1996 2138.94,1885.06 R45.1
OUT1: C7.2 J2.1 Q1.3 Q2.2 R3.1 U2.6 | length 2931.5
  Top Layer w15: C7.2 813.71,2001.29 873,1942 958,1942 989,1911 989,1597.67 Q2.2
  Top Layer w24: Q1.3 754.91,1114.91 R3.1 ; C7.2 814,2053.39 U2.6
  Top Layer w100: Q1.3 715,1323.67 Q2.2
  Bottom Layer w200: v5(812,1431) 812,709 1283,238 1283,117.74 1287,121.74 1287,115 1283,111
  other v1: 951,1243 859,1255 902,1255.74 766,1262 667.92,1267 719,1268 812,1274 947,1284 859,1290 904.05,1291 766,1302 673,1311 722,1312 947.88,1323 812,1328 858,1329.8 906.59,1336 764,1346 954,1361 675,1365 721,1366.03 811.03,1375 860.77,1375 906.06,1392 763,1394.74 950,1399 673,1411 721,1415 862,1418 952,1440 908,1441 769,1448 676,1458.93 718,1467 855,1474 909,1483 769,1494 952,1497 809,1499 675,1503 718,1515 859,1517 954.2,1525 903,1537 675,1545 771,1549 808,1553 853,1553 721,1556 949,1567 901,1567.87 677,1594 855.5,1596 809,1600 950,1602 718,1605 770,1605 904,1605
OUT2: C15.2 J2.2 Q3.3 Q4.2 R19.1 U4.6 | length 2719.8
  Top Layer w15: C15.2 1446.71,1998.29 1502,1943 1622,1943 1648,1917 1648,1595.17 Q4.2
  Top Layer w24: Q3.3 1416.41,1114.91 R19.1 ; C15.2 1447,2050.39 U4.6
  Top Layer w100: Q3.3 1376.5,1323.67 Q4.2
  Bottom Layer w200: v5(1474,1441) 1529.43,1385.57 J2.2
  other v1: 1608,1236 1465,1247 1649,1247 1520,1251 1419,1253 1325,1254 1561.02,1255 1419,1279 1583.85,1281 1520,1282 1367,1284 1648,1284 1557,1285 1619.3,1285 1473,1293 1319,1303 1426.03,1318 1645,1318.84 1563,1324 1520,1326 1375,1335 1602,1338.41 1470,1349 1645,1353 1523,1360 1325,1366 1426,1366 1563,1369 1601,1373 1475,1377 1369,1380 1645,1393 1523,1408 1425,1410 1608,1410 1325,1416 1559,1416 1369,1439.28 1649,1439 1519.74,1440 1429,1455 1562,1457 1325,1464 1649,1467 1613,1472 1518,1480 1371.75,1490 1468,1492 1616,1500 1562,1503 1649,1506 1372,1510 1323,1511.96 1426,1513 1518,1525 1472,1544 1558.26,1547 1654,1548 1608.83,1553 1375,1556 1429,1559 1319,1561 1515,1567 1468,1584 1557,1587 1608,1587 1374,1591.24 1643.83,1591 1515,1603 1428,1604 1321,1611 1477.12,1614
OUT3: C22.2 J2.3 Q5.3 Q6.2 R34.1 U5.6 | length 2966.6
  Top Layer w15: C22.2 2077.71,1997.18 2146.89,1928 2284,1928 2309,1903 2309,1594.67 Q6.2
  Top Layer w24: Q5.3 2077.91,1114.91 R34.1 ; C22.2 2078,2051.39 U5.6
  Top Layer w100: Q5.3 2038,1323.67 Q6.2
  Bottom Layer w160: J2.3 1841,177
  Bottom Layer w200: 1841,177 2139,475 v5(2139,1452)
  other v1: 2244,1245 1986,1246.54 2285,1250 2036,1253 2076,1255.54 2209,1255 2126,1257 2166,1260 2240,1281 2074,1287.15 1986.97,1288 2038,1296 2286,1296 2208,1298 2129.53,1301 2167,1303 2242,1315 2076,1321 1983,1331 2288,1336 2121,1348.29 2077,1349 2239,1349 2157,1351 2204,1351 2041,1356 1986,1366 2076,1372 2122,1390 2236,1390 2283,1390 2201,1397 2075,1397.96 2161,1399 2036,1412 1984,1418.25 2101,1426 2277.42,1434 2191,1437.52 2231,1439.95 2034,1452 2070,1452.86 2097,1471 1981,1473 2188,1475 2273,1480 2235,1490.58 2067,1490.81 2167,1495 2134,1498 2103,1516 2025.67,1518 2188,1518 2236,1519.8 2275,1523.23 2067,1534.71 1984,1538 2140,1540 2231,1551 2187,1555.71 2026,1564.42 2272,1568.65 2096,1570 2136,1570 2066,1574 2231,1588 2188,1599.14 1980,1600 2024.52,1604 2277,1609
PA1_VBUS: C21.1 R25.1 R29.1 R31.2 | length 1132.2
  Top Layer w12: C21.1@62.98,1650.64 62.98,1919.98 147,2004 147,2223 178,2254 347,2254 458.48,2365.48 R29.1
  Top Layer w24: R25.1 62.52,1593.69 R31.2 C21.1@62.98,1650.64
PA15_A+/H1: C31.1 R51.2 R52.2 R53.1 R63.2 | length 2744.9
  Top Layer w12: v1(1209,3259) 1321,3371 1699,3371 1947.5,3122.5 C31.1 ; R51.2 R51.2@1949,2982 ; v1(2060,2774) 2060,2772 2212,2620 2324,2620 2440.85,2503.15 R63.2
  Top Layer w15: C31.1 1948,3099.01 R51.2
  Top Layer w24: R52.2 v1@459.02,3258.02 ; v1(1949,2945) R51.2@1949,2982
  Bottom Layer w12: v1(460,3259) v1(1209,3259) ; v1(1949,2945) 1966,2928 1966,2816 2008,2774 v1(2060,2774)
PB3_B+/H2: C32.1 R54.1 R57.2 R58.2 R64.2 | length 1062.2
  Top Layer w10: R57.2 2016.48,2950.48 1966,2900 1966,2808 2178.07,2595.93 2310.07,2595.93 2452,2454
  Top Layer w15: R57.2 2016.48,3099.14 C32.1 ; 2452,2454 2475.98,2430.02 R64.2 R58.2
PB10_Z+/H3: C33.1 R55.1 R59.2 R60.2 R65.2 | length 1234.7
  Top Layer w15: C33.1 2139.96,3099.14 v1(2139.96,3072.52) R59.2 2139.96,2962.96 2068,2891 2068,2823 2247.5,2643.5 2469.5,2643.5 R60.2
  Top Layer w24: v1(2418,3303) 2474.83,3303 R65.2
  Bottom Layer w12: v1(2139.96,3072.52) 2139.96,3087.34 2184.12,3131.5 2252.88,3131.5 2418,3296.62 v1(2418,3303)
PC2: C28.1 NTC1.2 R56.1 R61.2 R62.2 | length 1152.4
  Top Layer w24: C28.1 456.86,2723.86 483.97,2750.97 R56.1 483.97,2809.97 532,2858 NTC1.2 ; R61.2 491.85,2033.85 508,2050 v4(508,2155)
  Bottom Layer w15: v4(508,2155) 508,2802 532,2826 NTC1.2
SENSE1: Q2.3 R4.1 R7.2 R12.1 R44.1 | length 607
  Top Layer w24: R7.2 558,1774 533,1799 533,1860 645.09,1972.09 R44.1 R4.1 ; Q2.3@711,1774 Q2.3 754.91,1817.91 R12.1
  Top Layer w80: R7.2 Q2.3@711,1774
SENSE2: Q4.3 R20.1 R23.2 R30.1 | length 708
  Top Layer w15: R23.2 1213,1788 1360,1935 1360,2065 1299.09,2125.91 R20.1 ; Q4.3 1416.41,1817.91
  Top Layer w24: 1416.41,1817.91 R30.1
  Top Layer w150: R23.2 1213.22,1778 Q4.3
SENSE3: Q6.3 R35.1 R42.2 R49.1 | length 722.5
  Top Layer w15: R35.1 1739.09,1830.91 1791.22,1778.78 R42.2
  Top Layer w20: Q6.3 2077.91,1817.91 R49.1
  Top Layer w150: R42.2 1884.78,1778 Q6.3
TIM1CH1: C13.1 R6.2 U2.2 | length 1907.4
  Top Layer w12: U2.2 C13.1@864,2457.04 ; C13.1 885.97,2457.5 895.52,2467.05 895.52,2536.48 v1(871,2561)
  Top Layer w15: v1(2429,2757) R6.2
  Bottom Layer w15: v1(871,2561) 912,2602 2033,2602 2075,2644 2316,2644 v1(2429,2757)
TIM1CH1N: C14.1 R9.2 U2.3 | length 2480.5
  Top Layer w12: v1(814,2291) U2.3 C14.1@814,2450.96 ; v1(2476,3057) R9.2
  Bottom Layer w12: v1(814,2291) 893,2370 2293,2370 2424,2501 2476,2553 2476,2629 v1(2476,3057)
TIM1CH2: C17.1 R22.2 U4.2 | length 1248.2
  Top Layer w12: C17.1 1531.5,2454.5 1553,2476 1553,2557 1592,2596 1721,2596 v1(1772,2647)
  Top Layer w15: U4.2 C17.1@1497,2449.04 ; v1(2430,2817) R22.2
  Bottom Layer w12: v1(1772,2647) 1799,2674 2287,2674 v1(2430,2817)
TIM1CH2N: C18.1 R27.2 U4.3 | length 1159.8
  Top Layer w12: R27.2 485,2240.85 492.85,2233 v1(551,2233)
  Top Layer w15: v1(1344,2303) 1431,2303 1447,2319 U4.3 C18.1@1447,2452.96
  Bottom Layer w15: v1(551,2233) 1274,2233 v1(1344,2303)
TIM1CH3: C25.1 R36.2 U5.2 | length 694
  Top Layer w10: C25.1 2148.5,2455.5 2168,2475 2168,2528 2215.93,2575.93 2301.07,2575.93 2426,2451 2426,2322 2459.85,2288.15 R36.2
  Top Layer w15: U5.2 C25.1@2128,2449.41
TIM1CH3N: C26.1 R43.2 U5.3 | length 705.7
  Top Layer w12: v1(2102,2608) v1@2103.09,2606.91
  Top Layer w15: C26.1 2045.86,2456.14 2037,2465 2037,2543 v1(2102,2608) ; U5.3 C26.1@2078,2454.59 ; v1(2425,2694) R43.2
  Bottom Layer w15: v1(2102,2608) 2339,2608 v1(2425,2694)
VA3.3: C4.1 L2.1 R2.2 R18.2 R33.2 U1.4 | length 576.5
  Top Layer w24: R2.2 v1@1487,2837.85 ; L2.1 1528.57,2838.48 C4.1@1538.01,2829.05 ; L2.1@1465,2843.57 U1.4
  Bottom Layer w24: v1(1487,2839) 1673,3025 v1(1738,3025)
VIN+: C1.1 C2.1 CE1.1 CE2.1 CE3.1 D2.K F1.2 Q1.2 Q3.2 Q5.2 R25.2 U3.1 | length 5006.3
  Top Layer w30: v4(117,1487) R25.2 ; CE2.1 CE2.1 C1.1 ; CE3.1 2756,345 2851.05,440.05 C2.1 2892,542.94 2892,840 2830,902 U3.1
  Top Layer w200: CE2.1 382,723 CE1.1 ; 447,402 386,463 CE1.1 ; 2493,354 2138,709 Q5.2 2136.33,719 CE1.1
  Bottom Layer w30: v4(117,1487) 117,1187 151,1153 302,1153 CE2.1 CE2.1@371,1233 ; v5(2538,343) 2540,345 CE3.1
VREF: C41.1 R38.1 R48.2 U1.12 | length 196.7
  Top Layer w15: U1.12 1415,3190 1429.24,3204.24 ; 1429.24,3210.24 R38.1 1537.96,3232.54 C41.1

## Polygon pours and split planes (outlines as drawn)
GND on Top Layer "Top Layer-No Net" (hatched 45Degree grid 10 track 10, remove dead copper, pour order 267): 2900,1975 2612,1975 2602,1985 2580.34,2006.66 2580.34,2213.47 2578.53,2213.47 2505,2287 2471,2321 2436,2321 2436,2477 2353,2560 2335,2578 1952,2578 1217,2578 1150,2645 1150,3179 1127,3179 1071,3235 1081,3245 1081,3326 600,3326 590,3336 586,3332 586,3195 586,2662 625,2623 603,2601 603,2172 603,2103 535,2035 542,2028 542,1997 542,1971 471,1900 460,1889 329,1889 305,1889 270,1924 265.98,1919.98 62.98,1919.98 57.98,1919.98 45,1907 37,1899 14,1899 14,3842 66,3894 70,3898 453,3898 474,3898 526,3846 552.18,3819.82 552.18,3606.59 552.18,3522.82 597,3478 604,3471 2302,3471 2315,3471 2394,3550 2403,3559 2403,3840 2406,3840 2464,3898 2468,3902 2825,3902 2850,3902 2906,3846 2903,3843 2903,1970
GND on Top Layer "Top Layer-No Net" (hatched 45Degree grid 10 track 10, remove dead copper, pour order 265): 2399,1919 2596,1919 2623,1946 2625,1948 2901,1948 2901,87 2857,43 2828,14 1904,14 1904,109 1906,111 1919,124 2613,124 2613,556 2561,608 2474,695 2474,1385 2474,1788 2397,1865 2403,1871 2403,1917
GND on Top Layer "Top Layer-No Net" (hatched 45Degree grid 10 track 10, remove dead copper, pour order 263): 1840,2175 1843,2172 2017,2172 2017,2007 2129,1895 2132.02,1891.98 2132.02,1850.06 1432.31,1850.06 1377,1905.37 1321,1961.37 1321,2156 1754,2156 1757,2159 1765,2151 1765,2127 1765,2119 1800,2084 1849,2035 1869,2035 1914,2035 1917,2038 1915,2040 1915,2092 1893,2092 1840,2145 1840,2173
GND on Top Layer "Top Layer-No Net" (hatched 45Degree grid 10 track 10, remove dead copper, pour order 261): 1068,2158 1048,2138 1048,2095 997,2095 947,2045 957,2035 957,1987 963,1987 1063,1887 1078,1872 1279,1872 1342,1935 1349,1942 1349,2051 1349,2060 1287,2122 1275,2110 1275,2097 1275,2090 1249,2064 1237,2052 1237,2048 1194,2048 1193,2047 1182,2058 1182,2101 1189,2101 1208,2120 1210,2122 1210,2162 1065,2162 1064,2161
GND on Top Layer "Top Layer-No Net" (hatched 45Degree grid 10 track 10, remove dead copper, pour order 259): 161,1896 266,1896 273,1889 309,1853 309,1843 395,1843 404,1852 443,1813 443,1685 471,1685 508,1648 513,1643 513,1338 354,1338 256,1240 228,1212 228,451 1755,451 1901,305 1888,292 1888,2 139,2 112,29 106,35 63,35 63,54 24,93 17,100 17,1891 146,1891 152,1897
SENSE1 on Top Layer "Top Layer-No Net" (hatched 45Degree grid 10 track 10, remove dead copper, pour order 257): 673,1974 769,1974 772,1971 874,1869 874,1725 951,1725 952,1726 940,1714 940,1660 525,1660 523,1658 522,1659 522,1738 573,1738 578,1743 571,1750 571,1841 581,1841 663,1923 673,1933 673,1975
SENSE2 on Top Layer "Top Layer-No Net" (hatched 45Degree grid 10 track 10, remove dead copper, pour order 255): 1380,1918 1431,1918 1439,1910 1506,1843 1520,1843 1520,1730 1533,1717 1536,1714 1591,1714 1591,1680 1578.84,1667.84 1572,1661 1176,1661 1176,1664 1103,1737 1095,1745 1095,1876 1248,1876 1251,1879 1251,1830 1303,1830 1325,1852 1377,1904 1377,1918
SENSE3 on Top Layer "Top Layer-No Net" (hatched 45Degree grid 10 track 10, remove dead copper, pour order 253): 1800,1882 2158,1882 2189,1851 2193,1847 2193,1716 2260,1716 2262,1714 2263,1713 2263,1666 1827,1666 1826,1665 1717,1774 1717,1794 1732,1794 1790,1736 1819,1736 1819,1808 1818,1809 1790,1837 1774,1837 1774,1876 1767,1883 1769,1881 1802,1881
OUT3 on Top Layer "Top Layer-No Net" (hatched 45Degree grid 10 track 10, remove dead copper, pour order 251): 2286,1918 2329,1918 2338,1909 2451,1796 2451,1707 2451,1222 2418,1189 2233,1004 2162,1004 1597,1004 1593,1000 1606,1013 1606,1064 1679,1064 1751.53,1136.53 1822,1207 1822,1665 2262,1665 2263,1666 2277,1680 2277,1910
OUT2 on Top Layer "Top Layer-No Net" (hatched 45Degree grid 10 track 10, remove dead copper, pour order 249): 1626,1902 1672,1902 1673,1903 1687,1889 1687,1880 1687,1771 1702,1756 1781,1677 1781,1215 1781,1185 1697,1101 1675,1079 1593,1079 1593,1009 1586,1002 1568,984 964.75,984 964.75,1027.75 968,1031 980,1043 1012,1043 1039,1043 1160,1164 1201,1205 1201,1659 1570,1659 1615,1704 1623,1712 1623,1901
OUT1 on Top Layer "Top Layer-No Net" (hatched 45Degree grid 10 track 10, remove dead copper, pour order 247): 964,1881 1036,1881 1042,1875 1064,1853 1064,1792 1064,1713 1143,1634 1129,1620 1129,1223 1129,1201 1039,1111 1017,1089 896,1089 896,1042 873,1019 861,1007 582,1007 582,1310 527,1365 533,1371 533,1650 941,1650 961,1670 963,1672 963,1877
VIN+ on Top Layer "Top Layer-No Net" (hatched 45Degree grid 10 track 10, remove dead copper, pour order 233): 373,1318 533,1318 534,1319 548,1305 548,984 2304,984 2469,1149 2471,1147 2551,1147 2551,570 2589,532 2591,530 2591,339 2591,139 2587,135 1901,135 1901,274 1894,281 1875,300 911,300 911,490 903,498 898,493 550,493 550,236 546,240 454,240 454,267 310,411 333,434 333,1270 333,1274 365,1306
NetF1_1 on Top Layer "Top Layer-No Net" (hatched 45Degree grid 10 track 10, remove dead copper, pour order 231): 626,475 626,119 627,118 628,117 861,117 861,474 860,475 625,475
AGND on Top Layer "Top Layer-No Net" (hatched 45Degree grid 20 track 8, remove dead copper, pour order 215): 1294,3209 1299.13,3214.13 1668.75,3214.13 1668.75,2733.75 1627,2692 1620,2685 1314,2685 1262,2685 1259,2688 1286,2715 1286,3221 1313.13,3221 1322.37,3211.76
GND on Top Layer "Top Layer-No Net" (hatched 45Degree grid 20 track 20, remove dead copper, pour order 221): 2560,1961 2555,1956 2224,1956 2224,2139 2217,2146 2221,2150 2221,2195 687,2195 673,2209 625,2257 625,3293 1027,3293 1039,3281 1116,3204 1116,2909 1116,2651 1186,2581 1236,2531 2327,2531 2327,2522 2404,2445 2438,2411 2438,2276 2477,2276 2551,2202 2555.29,2197.71 2555.29,1971.82 2482.82,1971.82 2465,1954
GND on Bottom Layer "Top Layer-No Net" (hatched 45Degree grid 10 track 10, remove dead copper, pour order 245): 2905,1992 2606,1992 2598,2000 2592,2006 2592,2214 2592,2228 2540,2280 2528,2292 2453,2292 2453,2462 2416,2499 2316,2599 2099,2599 1204,2599 1194,2609 1146,2657 1146,2926 1146,3227 1101,3272 604,3272 604,3031.12 592.38,3019.5 591,3018.12 591,2673 591,2661 713,2539 711,2537 711,2450 671,2450 600,2379 593,2372 593,2274 558,2274 539,2255 442,2158 442,2102 442,2010 368,1936 364,1932 164,1932 132,1932 119,1919 119,1707 37,1707 28,1698 26,1700 26,3800 26,3832 88,3894 96,3886 473,3886 490,3886 538,3838 543,3833 543,3545 543,3528 608,3463 610,3461 2270,3461 2313,3461 2378,3526 2399,3547 2399,3829 2399,3847 2450,3898 2815,3898 2857,3898 2900,3855 2899,3854 2899,1996
GND on Bottom Layer "Top Layer-No Net" (hatched 45Degree grid 10 track 10, remove dead copper, pour order 243): 2560,1949 2561,1948 2582,1948 2582,1700 2569,1687 2576,1680 2576,589 2576,575 2606,545 2609,542 2609,16 2850,16 2883,49 2914,80 2914,111 2914,1947 2912,1949 2911,1948 2582,1948
GND on Bottom Layer "Top Layer-No Net" (hatched 45Degree grid 10 track 10, remove dead copper, pour order 241): 2559,1919 2559,1722 2552,1715 2531,1694 577,1694 569,1694 535,1660 540,1655 540,733 566,733 1051,248 1095,204 1095,20 100,20 96,16 24,88 24,107 24,1660 17,1667 162,1667 162,1892 158,1896 161,1899 376,1899 376,1904 460,1988 486,2014 486,2210 645,2210 686,2169 699,2156 779,2156 2040,2156 2045,2151 2043,2149 2043,1923 2552,1923 2554,1921
OUT1 on Bottom Layer "Top Layer-No Net" (hatched 45Degree grid 10 track 10, remove dead copper, pour order 239): 574,1662 1090,1662 1096,1668 1111,1653 1111,822 1111,810 1317,604 1372,549 1372,34 1126,34 1123,31 1077,77 1077,246 1077,253 917,413 574,756 574,1659
OUT2 on Bottom Layer "Top Layer-No Net" (hatched 45Degree grid 10 track 10, remove dead copper, pour order 237): 1147,1681 1772,1681 1774,1679 1789,1664 1789,425 1789,395 1646,252 1644,250 1644,3 1412,3 1411,2 1394,19 1394,344 1394,611 1147,858 1147,1678
OUT3 on Bottom Layer "Top Layer-No Net" (hatched 45Degree grid 10 track 10, remove dead copper, pour order 235): 1829,1688 1830,1689 2543,1689 2543,571 2588,526 2588,8 1685,8 1676,17 1662,31 1662,170 1662,214 1710,262 1810,362 1810,440 1810,1688 1815,1693 1816,1694 1831,1694
AGND on Bottom Layer "Top Layer-No Net" (hatched 45Degree grid 20 track 8, remove dead copper, pour order 219): 1300,3206 1701,3206 1704,3209 1722,3191 1722,2968 1722,2747 1637,2662 1623,2648 1250,2648 1250,3153 1301,3204
GND on Bottom Layer "Top Layer-No Net" (hatched 45Degree grid 20 track 20, remove dead copper, pour order 223): 630,3300 635,3295 1039,3295 1039,3278 1107,3210 1118,3199 1118,2725 1118,2631 1200,2549 2250,2549 2296,2549 2412,2433 2412,2298 2412,2276 2446,2242 2447,2241 2507,2241 2515,2241 2544,2212 2560,2196 2560,1949 2099,1949 2097,1947 2075,1969 2075,2185 711,2185 667,2229 629,2267 629,3279

## Keep-outs
Keep-Out Layer:
  lines w10: 552.18,3606.59 552.18,3803.1 ccw(c434.07,3803.1) 434.07,3921.21 119.11,3921.22 ccw(c119.11,3803.11) 1,3803.11 1,115.85 ccw(c119.11,115.85) 119.11,-2.26 2806.51,-2.26 ; 552.54,3606.24 ccw(c670.65,3606.24) 670.65,3488.13 2255.33,3488.13 ccw(c2255.33,3606.24) 2373.44,3606.24 2373.44,3803.1 cw(c2491.55,3803.1) 2491.55,3921.21 2806.51,3921.22 cw(c2806.51,3803.11) 2924.62,3803.11 2924.62,115.85 ; 2797.98,-1.95 ccw(c2806.51,115.85) 2924.31,124.39

## Other copper
Top Layer:
  rectangle net GND: 1443,2504 1512,2535
  rectangle net GND: 636,2967 952,3249

## Silkscreen, mask and mechanical layers (free items; w line width, h text height)
Top Overlay:
  text "+5V" at 2167,2741 h40
  text "GND" at 2285,2741 h40
  text "HA" at 1887,2711 h40
  text "HB" at 1984,2694 h40
  text "HC" at 2082,2684 h40
  text "低压FOC驱动开发评估板" at 1720,398 h80
  text "OUT2" at 1465,329 h40
  text "IHM08M1-DG" at 1958,316 h50
  text "V-" at 945,279 h60
  text "OUT1" at 1239,275 h60
  text "V+" at 733,273 h60
  text "OUT3" at 1633,268 h60
  text "rev D" at 1960,227 h60
  text "QQ群 :124545085" at 86,145 h120
  text "锝臻科技" at 256,68 h120

## Text inside footprints (layer, text, board x,y; h text height)
CE1: Bottom Overlay "+" at 354.52,701.29 h60 r180
CE2: Bottom Overlay "+" at 350.52,1215.29 h60 r180
CE3: Bottom Overlay "+" at 2717.84,318.44 h60 r270
CE4: Bottom Overlay "+" at 2643.19,1833.16 h39.37